# Altium PCB DCSupplyHub-v2.PcbDoc (part 2 of 2)
Units mm, origin at the board's own origin, x right, y up, seen from the top; angles counter-clockwise.
Board outline 81.6 x 57 mm, 2 copper layers (Top Layer, Bottom Layer), stack 1 mm thick; 121 components, 68 nets, 381 pads, 249 vias.
Unrouted connection lines stored in the file: 83.
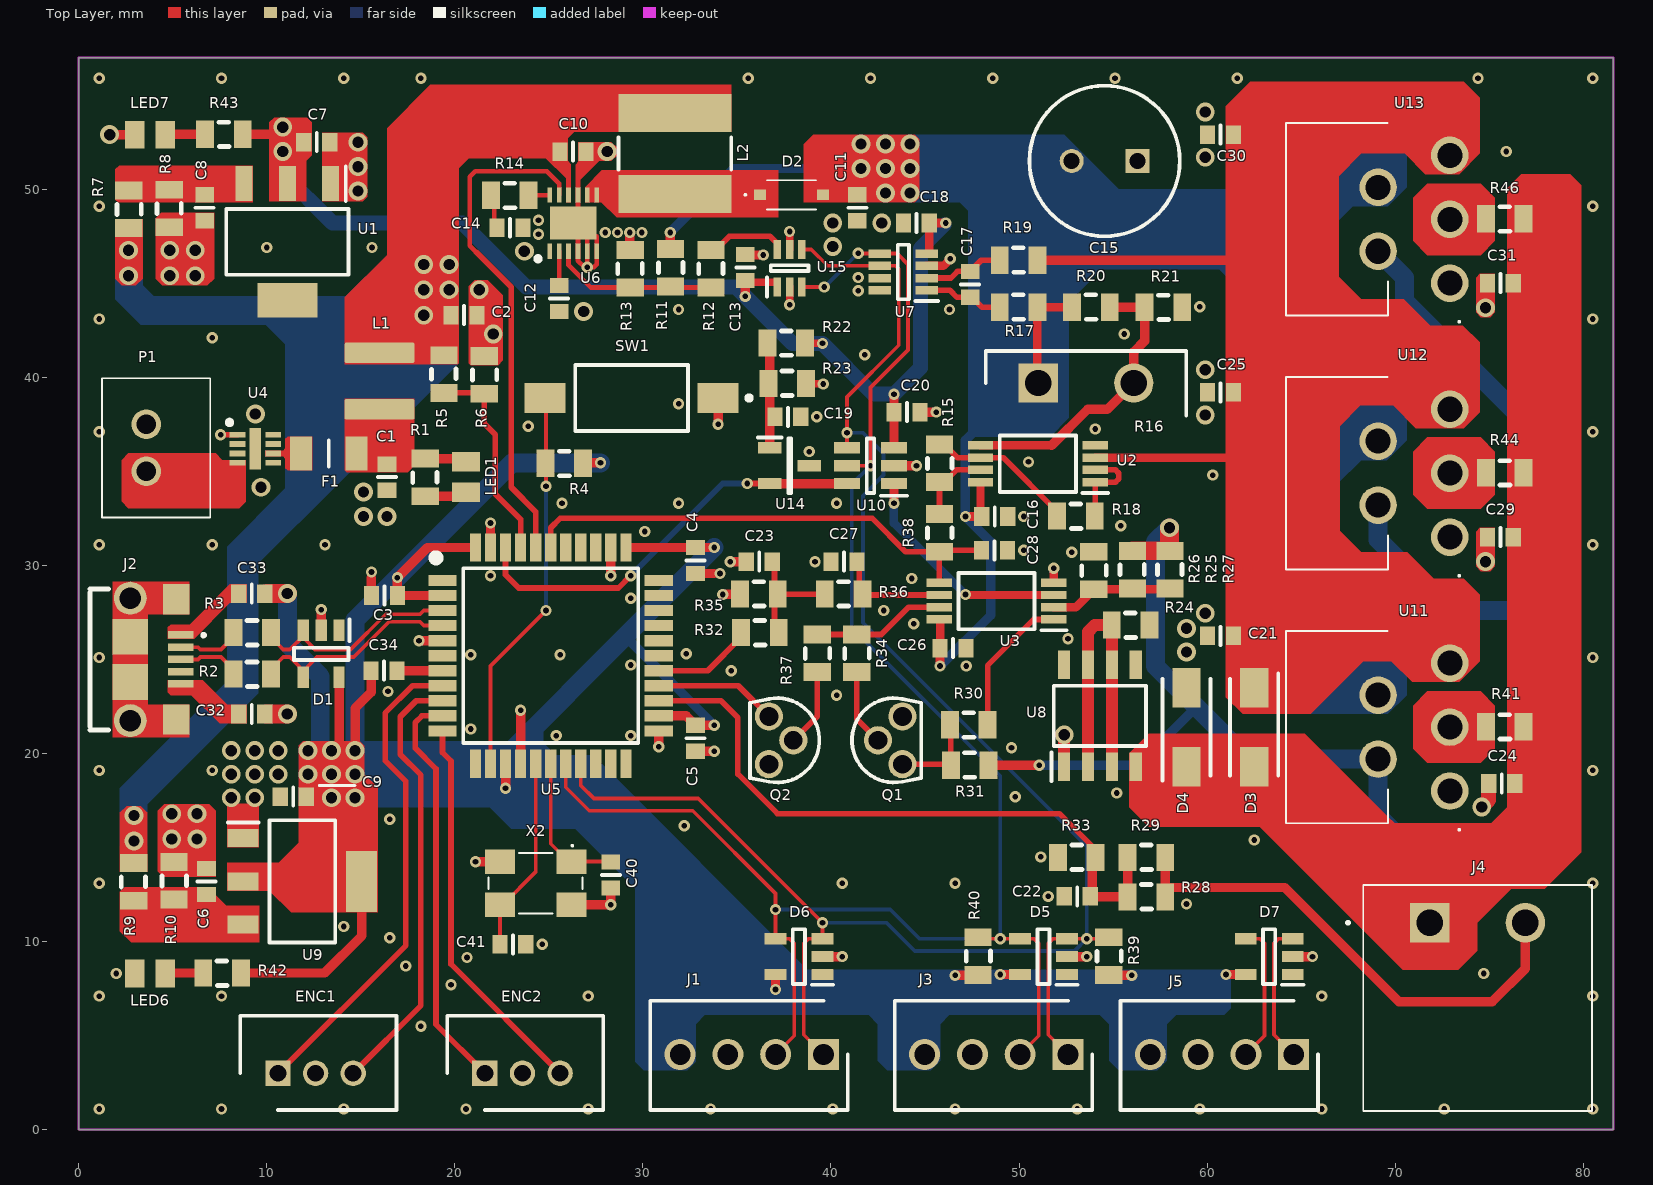
[diagram p0: Top Layer view]

## Other copper (continued)
Top Layer: (continued)
  region net +36V: 1.95,48.4 1.95,45.25 2.3,44.9 3.05,44.9 3.4,45.25 3.4,48.4
  region net NetC8_2: 9.25,51.25 2.15,51.25 1.95,51.05 1.95,49.45 2.1,49.3 9.25,49.3
  region net +36V: 14.15,40.7 20.15,40.7 20.2,40.75 20.2,46.25 19.95,46.5 16.4,46.5 14.15,44.25
  region net NetC1_1: 14.15,38.85 14.15,35.05 14.25,34.95 17.5,34.95 17.85,35.3 17.85,38.85
  region net NetF1_1: 9.925,36.1 10.875,36.1 11,36.225 11,36.725 11.125,36.85 12.425,36.85 12.425,35.05 11.125,35.05 11,35.175 11,35.675 10.875,35.8 9.925,35.8
  region net NetP1_2: 8.875,35.6 8.875,33.375 8.55,33.05 2.65,33.05 2.3,33.4 2.3,35.6 2.65,35.95 7.3,35.95 7.65,35.6
  region net NetC32_2: 4.75,23.9 4.75,23.25 4.9,23.1 6,23.1 7.5,21.6 8.95,21.6 8.95,22.6 7.9,22.6 6.6,23.9
  region net NetC33_1: 4.75,26.1 4.75,26.7 4.9,26.85 5.9,26.85 8.05,29 8.95,29 8.95,28 8.05,28 6.15,26.1
Bottom Layer:
  pour cut-out: 21.7,14.8 26.9,14.8 26.9,11.4 21.7,11.4
  region net +5: 26.95,19.9 25.383,19.9 24.7,20.583 24.7,21.6 23.8,20.7 23.8,20.3 24.5,19.6 26.8,19.6 26.95,19.75
  region net +36V: 3.1,47.25 3.4,46.95 3.4,44.9 4,44.3 14.2,44.3 16.4,46.5 19.95,46.5 20.2,46.25 20.2,40.75 13.8,34.35 9.55,30.1 9.55,23.2 3.65,17.3 3.65,15.1 3.25,14.7 2.6,14.7 2.2,15.1 2.2,18.15 7.9,23.85 7.9,31 11,34.1 11,41.75 9.95,42.8 3.3,42.8 1.95,44.15 1.95,46.95 2.25,47.25 2.65,47.25
  region net +5: 11.95,20.65 24.2,20.65 24.95,19.9 27.35,19.9 38.75,8.5 61.15,8.5 61.25,8.4 61.25,6.45 60.9,6.1 58.35,6.1 57.85,5.6 57.85,3.65 57.35,3.15 55.3,3.15 54.8,3.65 54.8,5.6 54.3,6.1 46.3,6.1 45.8,5.6 45.8,3.65 45.3,3.15 43,3.15 42.5,3.65 42.5,5.6 42,6.1 33.3,6.1 32.8,5.6 32.8,3.6 32.35,3.15 30.05,3.15 29.6,3.6 29.6,12.8 26.4,16 23,16 21.85,17.15 11.95,17.15 11.7,17.4 11.7,20.4
  region net +5: 14.95,20.65 15.2,20.4 15.2,17.4 14.95,17.15 11.95,17.15 11.7,17.4 11.7,20.4 11.95,20.65
  region net V+: 52.4,52.9 55.3,50 61.4,50 65.75,54.35 69.6,54.35 70.6,53.35 70.6,50.1 69.6,49.1 67.75,49.1 66.9,48.25 66.9,41.85 68.05,40.7 69.55,40.7 70.6,39.65 70.6,36.65 69.55,35.6 68.2,35.6 66.9,34.3 66.9,28.2 68.05,27.05 69.6,27.05 70.6,26.05 70.6,23.1 69.6,22.1 65.05,22.1 62.4,24.75 62.4,44 60.65,45.75 54.4,45.75 52.65,44 52.65,37.85 51.65,36.85 47.3,36.85 47.3,48.85 46.85,49.3 41.35,49.3 41.1,49.55 41.1,52.65 41.35,52.9

## Silkscreen, mask and mechanical layers (free items; w line width, h text height)
Top Overlay:
  lines w0.15: 12.8,18.3 14.7,18.3
Top Solder:
  the board outline again, w1
Bottom Solder:
  the board outline again, w1